# Altium PCB ActuatedFin_v1.PcbDoc
Units mm, origin at the board's own origin, x right, y up, seen from the top; angles counter-clockwise.
Board outline 24.64 x 53.59 mm, 2 copper layers (Top Layer, Bottom Layer); 8 components, 9 nets, 59 pads, 8 vias.
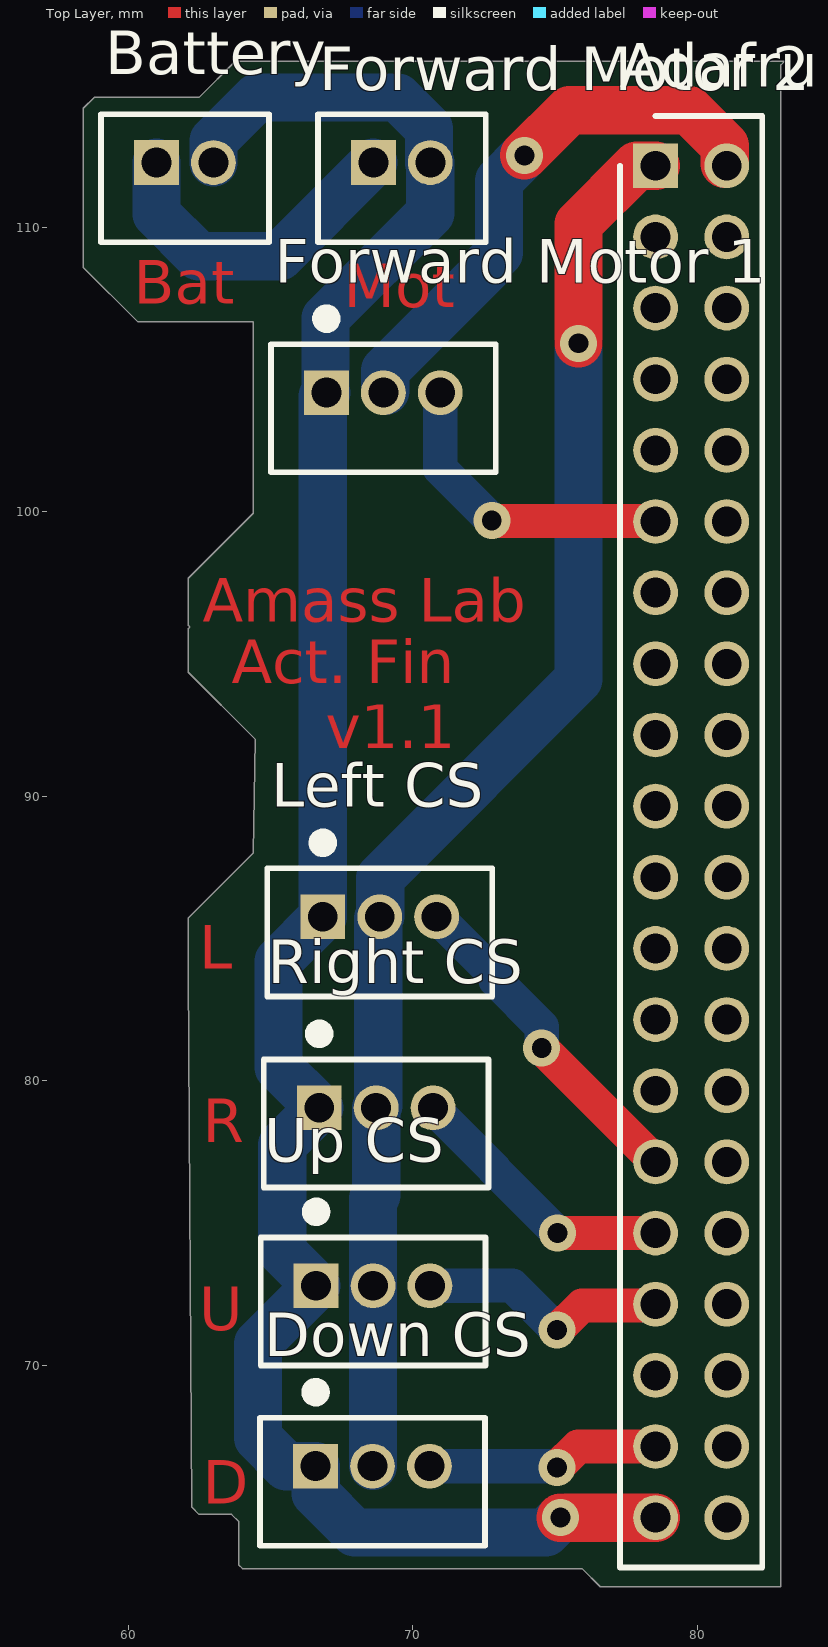
[diagram p0: Top Layer view]
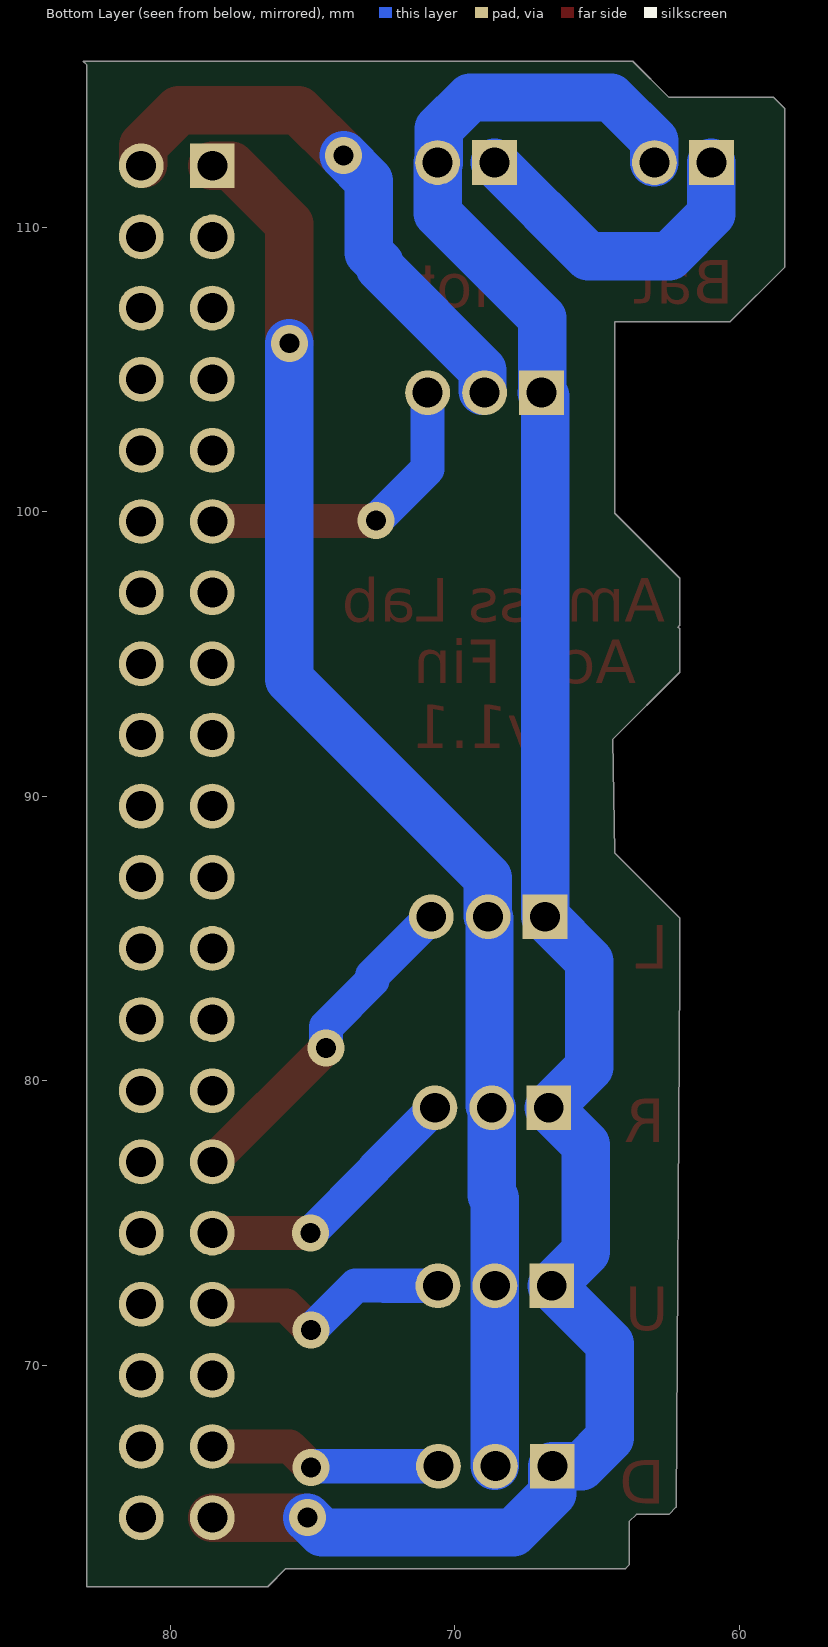
[diagram p1: Bottom Layer view, seen from below]

## Layer stack, top to bottom
Top Solder: solder mask 0.0102, Solder Resist, Dk 3.5
Top Layer: signal copper 0.0356
Dielectric 1: dielectric 0.32, FR-4, Dk 4.8
Bottom Layer: signal copper 0.0356
Bottom Solder: solder mask 0.0102, Solder Resist, Dk 3.5

## Board outline
64.389,88.011 64.453,92.011 62.103,94.361 62.103,95.885 62.166,95.948 62.103,96.012 62.103,97.663 64.389,99.949 64.389,106.68 60.325,106.68 58.42,108.585 58.42,114.173 58.801,114.554 62.484,114.554 63.754,115.824 83.058,115.824 82.931,115.697 82.931,62.23 76.581,62.23 75.946,62.865 64.008,62.865 63.881,62.992 63.881,64.516 63.627,64.77 62.484,64.77 62.23,65.024 62.103,83.82 62.103,85.725

## Design rules (kind name [scope] priority, off if disabled: settings)
Clearance [All] p1: gap=0.254 ignorepadtopadclearanceinfootprint=FALSE
PolygonConnect [All] p1: connectstyle=Relief reliefconductorwidth=0.254 reliefentries=4 polygonreliefangle="90 Angle" airgapwidth=0.254
RoutingVias [All] p1: holewidth=0.711 width=1.27 viastyle="Through Hole" minholewidth=0.711 minwidth=1.27 maxholewidth=0.711 maxwidth=1.27
SolderMaskExpansion [All] p1: expansion=0.102 istentingtop=FALSE
Width [All] p1: maxlimit=1.2 minlimit=1.2 preferedwidth=1.2 minimp=50.000000 maximp=50.000000 favimp=50.000000
30 further rules are at their usual default settings.

## Components (designator, comment, footprint, x,y, rotation, side; value= is the part's Value field where it differs from the comment)
"Adafruit GPIO" "1979" RHDR40W60P250_2X20_5100X500X23 78.526,112.155 r270 top
Battery "B2B-PH-K-S(LF)(SN)" JST-B2B-PH-K-S_V 61.992,111.718 r0 top
"Down CS" "B3B-PH-K-S(LF)(SN)" JST-B3B-PH-K-S-3_V 68.58,65.913 r0 top
"Forward Motor 1" "B3B-PH-K-S(LF)(SN)" JST-B3B-PH-K-S-3_V 68.961,103.632 r0 top
"Forward Motor 2" "B2B-PH-K-S(LF)(SN)" JST-B2B-PH-K-S_V 69.612,111.718 r0 top
"Left CS" "B3B-PH-K-S(LF)(SN)" JST-B3B-PH-K-S-3_V 68.834,85.217 r0 top
"Right CS" "B3B-PH-K-S(LF)(SN)" JST-B3B-PH-K-S-3_V 68.707,78.505 r0 top
"Up CS" "B3B-PH-K-S(LF)(SN)" JST-B3B-PH-K-S-3_V 68.599,72.251 r0 top

## Footprints (in the part's own frame and the unit in brackets; to place one, negate y for a bottom-side part, rotate by r counter-clockwise, add the part's x,y. Pads: shape width x height; smd on the part's side, far side on the other; paste and mask are expansions set on the pad)
JST-B2B-PH-K-S_V [mm] "Connector, 2-Leads, Body 5.9x4.5mm, Pitch 2mm"
  rect 1.575x1.575 hole 1.05: 1(-1,0.55)
  round 1.575 hole 1.05: 2(1,0.55)
  silkscreen extent -2.95,-2.25 2.95,2.25, body extent -2.95,-2.25 2.95,2.25, height 6
JST-B3B-PH-K-S-3_V [mm] "Connector, 3-Leads, Body 7.9x4.5mm, Pitch 2mm"
  rect 1.575x1.575 hole 1.05: 1(-2,0.55)
  round 1.575 hole 1.05: 2(0,0.55) 3(2,0.55)
  silkscreen extent -3.95,-2.25 3.95,3.4, body extent -3.95,-2.25 3.95,2.25, height 6
RHDR40W60P250_2X20_5100X500X23 [mm]
  rect 1.575x1.575 / inner round 1.575 / far side rect 1.575x1.575 hole 1.05: 1(0,0)
  round 1.575 hole 1.05: 2(0,2.5) 3(2.5,0) 4(2.5,2.5) 5(5,0) 6(5,2.5) 7(7.5,0) 8(7.5,2.5) 9(10,0) 10(10,2.5) 11(12.5,0) 12(12.5,2.5) 13(15,0) 14(15,2.5) 15(17.5,0) 16(17.5,2.5) 17(20,0) 18(20,2.5) 19(22.5,0) 20(22.5,2.5) 21(25,0) 22(25,2.5) 23(27.5,0) 24(27.5,2.5) 25(30,0) 26(30,2.5) 27(32.5,0) 28(32.5,2.5) 29(35,0) 30(35,2.5) 31(37.5,0) 32(37.5,2.5) 33(40,0) 34(40,2.5) 35(42.5,0) 36(42.5,2.5) 37(45,0) 38(45,2.5) 39(47.5,0) 40(47.5,2.5)
  silkscreen extent -1.75,-1.25 49.25,3.75

## Part data
"Adafruit GPIO": library part CMP-002-00071-1, "Stacking Header for Pi A+/B+/Pi 2/Pi 3 - 2x20 Extra Tall Header", Case/Package=None, Check_prices=https://www.snapeda.com/parts/1979/Adafruit+Industries+LLC/view-part/?ref=eda, Component Type=Standard, Design Item ID=1979, MF="Adafruit Industries", MP=1979, Pins=40, SnapEDA_Link=https://www.snapeda.com/parts/1979/Adafruit+Industries+LLC/view-part/?ref=snap, Source=1979.SchLib
Battery "Forward Motor 2": library part CMP-2000-05162-1, "Male Header, Pitch 2 mm, 1 x 2 Position, Height 6 mm, Tail Length 3.4 mm, -25 to 85 degC, RoHS, Bulk", Manufacturer=JST, Datasheet URL=http://datasheet.octopart.com/B2B-PH-K-S%28LF%29%28SN%29-JST-datasheet-8324864.pdf, Datasheet Version=Nov-08, Manufacturer URL=http://www.jst.com/home2.html, No of Positions=2, Pitch=2mm, Style/Orientation=StraightHeader/Plug, Termination=Crimp, Type=ShroudedHeader
"Down CS" "Forward Motor 1" "Left CS" "Right CS" "Up CS": library part CMP-2000-05164-1, "Male Header, Pitch 2 mm, 1 x 3 Position, Height 6 mm, Tail Length 3.4 mm, -25 to 85 degC, RoHS, Bulk", Manufacturer=JST, Datasheet URL=https://datasheet.ciiva.com/11746/0900766b80826550-11746939.pdf, Datasheet Version=Oct-06, Manufacturer URL=http://www.jst.com/home2.html, No of Positions=3, Pitch=2mm, Style/Orientation=StraightHeader/Plug, Termination=Crimp, Type=ShroudedHeader

## Via types
v1: diameter 1.3, hole 0.7, Top Layer to Bottom Layer, 8 vias

## Nets (pads, with @x,y where several pads share a name; then routed paths per layer and width w, separated by ;. In a path a pad name is that pad's centre, name@x,y a point inside that pad or via, vN(x,y) a via of type N, cw(c..) or ccw(c..) an arc to the next point about the centre after c; other vN are vias at no path point)
"NetAdafruit GPIO_1": "Adafruit GPIO.1" "Down CS.2" "Left CS.2" "Right CS.2" "Up CS.2" | length 50.2
  Top Layer w1.7: v1(75.819,105.918) 75.819,110.109 77.865,112.155 78.526,112.155
  Bottom Layer w1.2: 68.834,85.767 68.853,85.786
  Bottom Layer w1.7: 68.599,66.482 68.599,75.874 68.707,75.982 68.707,79.055 68.788,79.136 68.788,85.721 68.834,85.767 ; 68.853,85.786 68.853,87.141 75.819,94.107 v1(75.819,105.918)
"NetAdafruit GPIO_2": "Adafruit GPIO.2" "Forward Motor 1.2" | length 19.4
  Top Layer w1.2: 80.954,112.227 81.026,112.155
  Top Layer w1.7: v1(73.914,112.522) 75.501,114.109 79.708,114.109 80.954,112.863 80.954,112.227
  Bottom Layer w1.2: 68.961,104.182 69.033,104.254 ; 80.954,112.227 81.026,112.155
  Bottom Layer w1.7: 69.033,104.254 69.033,104.974 72.644,108.585 72.644,108.712 73.025,109.093 73.025,111.633 v1(73.914,112.522)
"NetAdafruit GPIO_11": "Adafruit GPIO.11" "Forward Motor 1.3" | length 11
  Top Layer w1.2: v1(72.771,99.695) 72.79,99.676 78.505,99.676 78.526,99.655
  Bottom Layer w1.2: 70.961,104.182 70.961,101.505 v1(72.771,99.695)
"NetAdafruit GPIO_29": "Adafruit GPIO.29" "Left CS.3" | length 11.8
  Top Layer w1.2: v1(74.527,81.154) 78.526,77.155
  Bottom Layer w1.2: 70.834,85.767 72.906,83.695 72.906,83.526 74.527,81.905 v1(74.527,81.154)
"NetAdafruit GPIO_31": "Adafruit GPIO.31" "Right CS.3" | length 9.7
  Top Layer w1.2: v1(75.078,74.655) 78.526,74.655
  Bottom Layer w1.2: 70.707,79.055 72.849,76.913 72.849,76.884 v1(75.078,74.655)
"NetAdafruit GPIO_33": "Adafruit GPIO.33" "Up CS.3" | length 9
  Top Layer w1.2: v1(75.057,71.247) 75.076,71.247 75.938,72.11 78.481,72.11 78.526,72.155
  Bottom Layer w1.2: 70.599,72.801 72.485,72.801 72.497,72.813 73.491,72.813 v1(75.057,71.247)
"NetAdafruit GPIO_37": "Adafruit GPIO.37" "Down CS.3" | length 8.3
  Top Layer w1.2: v1(75.057,66.421) 75.076,66.421 75.81,67.155 78.526,67.155
  Bottom Layer w1.2: 70.58,66.463 75.015,66.463 v1(75.057,66.421)
"NetAdafruit GPIO_39": "Adafruit GPIO.39" "Down CS.1" "Forward Motor 1.1" "Forward Motor 2.2" "Left CS.1" "Right CS.1" "Up CS.1" Battery.2 | length 76.4
  Top Layer w1.7: v1(75.184,64.655) 78.526,64.655
  Bottom Layer w1.2: 66.834,101.132 66.961,101.259 ; 66.929,104.214 66.961,104.182
  Bottom Layer w1.7: Battery.2 62.992,113.03 64.516,114.554 69.462,114.554 70.566,113.45 70.566,112.242 ; 66.929,104.214 66.929,106.807 70.612,110.49 70.612,112.268 ; 66.961,104.182 66.834,104.055 66.834,101.132 66.834,85.767 65.278,84.211 65.278,80.484 66.707,79.055 65.405,77.753 65.405,73.995 66.599,72.801 64.558,70.76 64.558,67.459 65.554,66.463 66.58,66.463 66.58,65.505 67.95,64.135 74.664,64.135 v1(75.184,64.655)
NetBattery_1: "Forward Motor 2.1" Battery.1 | length 11.4
  Bottom Layer w1.7: Battery.1 60.992,110.458 62.476,108.974 65.318,108.974 68.612,112.268
pads on no net: "Adafruit GPIO.3" "Adafruit GPIO.4" "Adafruit GPIO.5" "Adafruit GPIO.6" "Adafruit GPIO.7" "Adafruit GPIO.8" "Adafruit GPIO.9" "Adafruit GPIO.10" "Adafruit GPIO.12" "Adafruit GPIO.13" "Adafruit GPIO.14" "Adafruit GPIO.15" "Adafruit GPIO.16" "Adafruit GPIO.17" "Adafruit GPIO.18" "Adafruit GPIO.19" "Adafruit GPIO.20" "Adafruit GPIO.21" "Adafruit GPIO.22" "Adafruit GPIO.23" "Adafruit GPIO.24" "Adafruit GPIO.25" "Adafruit GPIO.26" "Adafruit GPIO.27" "Adafruit GPIO.28" "Adafruit GPIO.30" "Adafruit GPIO.32" "Adafruit GPIO.34" "Adafruit GPIO.35" "Adafruit GPIO.36" "Adafruit GPIO.38" "Adafruit GPIO.40"

## Other copper
Top Layer:
  text "Bat" at 60.198,107.315 h1.52
  text "Mot" at 67.564,107.188 h1.52
  text "Amass Lab" at 62.611,96.139 h1.52
  text "Act. Fin" at 63.629,93.98 h1.52
  text "v1.1" at 66.93,91.694 h1.52
  text "L" at 62.484,83.947 h1.52
  text "R" at 62.611,77.851 h1.52
  text "U" at 62.484,71.247 h1.52
  text "D" at 62.611,65.151 h1.52